# Altium PCB coaster.PcbDoc (part 2 of 2)
Units mm, origin at the board's own origin, x right, y up, seen from the top; angles counter-clockwise.
Board outline 33.53 x 29.59 mm, 2 copper layers (Top Layer, Bottom Layer); 49 components, 51 nets, 176 pads, 66 vias.
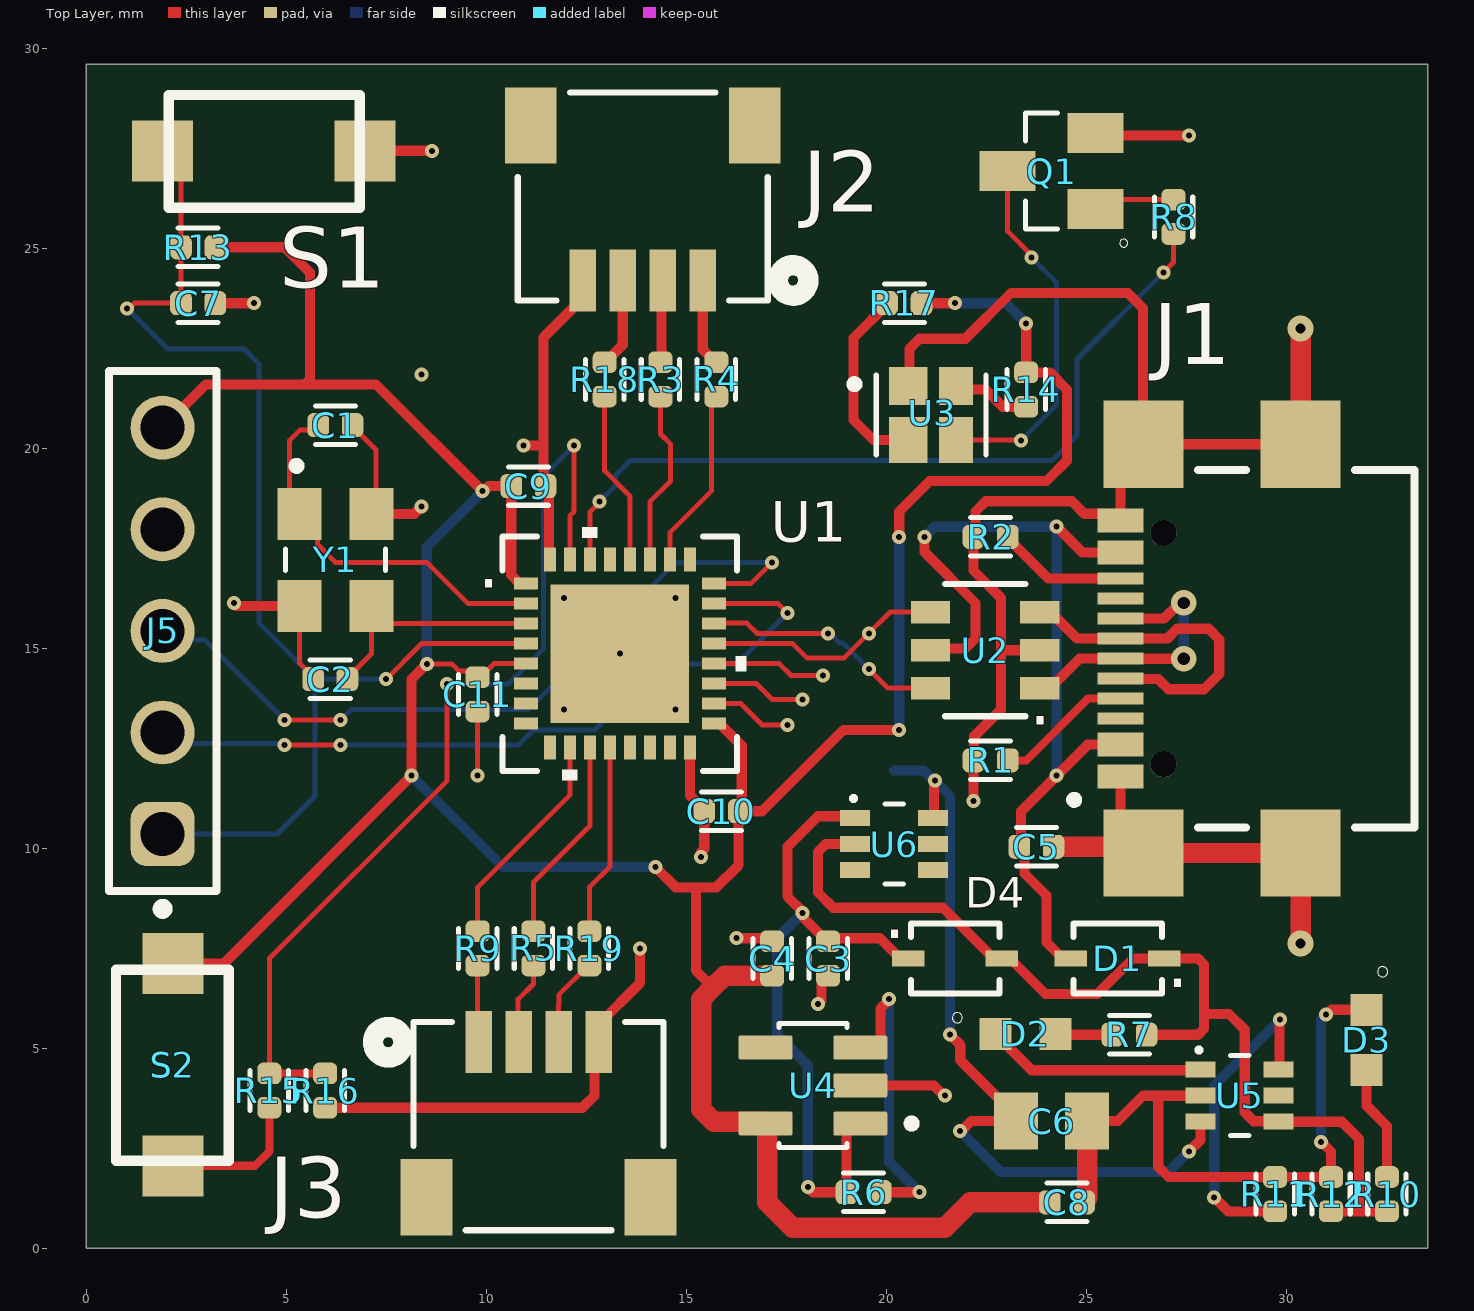
[diagram p0: Top Layer view]

## Via types
v1: diameter 0.35, hole 0.15, Top Layer to Bottom Layer, 62 vias
v2: diameter 0.65, hole 0.25, Top Layer to Bottom Layer, 2 vias
v3: diameter 0.635, hole 0.305, Top Layer to Bottom Layer, 2 vias

## Nets (pads, with @x,y where several pads share a name; then routed paths per layer and width w, separated by ;. In a path a pad name is that pad's centre, name@x,y a point inside that pad or via, vN(x,y) a via of type N, cw(c..) or ccw(c..) an arc to the next point about the centre after c; other vN are vias at no path point) (continued)
NetC3_1: (continued)
  Top Layer w0.254: v1(18.034,1.524) 18.161,1.397 R6.2 19.001,2.941 19.174,3.114 U4.1 ; U6.1 19.171,10.795 18.288,10.795 17.526,10.033 17.526,8.787 17.907,8.406 v1(17.907,8.382) 17.925,8.364 17.925,8.256 18.512,7.669 C3.1 18.62,7.747 19.837,7.747 20.345,7.239 D4.1
  Bottom Layer w0.254: v1(17.907,8.382) 17.272,7.747 17.272,5.334 18.034,4.572 v1(18.034,1.524)
NetD2_A: D2.A R7.2 | length 1.4
  Top Layer w0.254: D2.A 24.244,5.334 R7.2
NetD2_C: D2.C U5.1 | length 5.5
  Top Layer w0.254: D2.C 23.633,4.445 27.839,4.445 U5.1
NetD3_A: D3.A R10.2 | length 2.9
  Top Layer w0.254: D3.A 32.004,3.556 32.512,3.048 R10.2
NetJ1_A5: J1.A5 R1.1 | length 3.5
  Top Layer w0.203: R1.1 23.495,12.192 25.039,13.736 J1.A5
NetJ1_B5: J1.B5 R2.2 | length 3.3
  Top Layer w0.254: R2.2 23.036,17.75 24.05,16.736 J1.B5
NetJ2_1: J2.1 R4.2 | length 2.2
  Top Layer w0.254: J2.1 15.408,22.466 15.727,22.147 R4.2
NetJ2_2: J2.2 R3.2 | length 2.1
  Top Layer w0.254: R3.2 14.379,22.175 14.379,24.162 J2.2
NetJ2_3: J2.3 R18.2 | length 2.2
  Top Layer w0.254: R18.2 12.975,22.147 13.408,22.579 J2.3
NetJ3_1: J3.1 R9.2 | length 1.9
  Top Layer w0.125: R9.2 9.779,5.171 J3.1
NetJ3_2: J3.2 R5.2 | length 2.1
  Top Layer w0.125: J3.2 10.795,5.155 10.795,6.223 11.176,6.604 R5.2
NetJ3_3: J3.3 R19.2 | length 2.3
  Top Layer w0.125: J3.3 11.803,6.088 11.811,6.096 11.811,6.331 12.543,7.063 R19.2
NetQ1_1: Q1.1 R8.1 | length 2
  Top Layer w0.125: Q1.1 25.468,26.211 R8.1
NetQ1_3: Q1.3 U3.4 | length 9.2
  Top Layer w0.125: U3.4 23.358,20.203 v1(23.368,20.193) ; Q1.3 23.031,25.417 23.622,24.826 v1(23.622,24.765)
  Bottom Layer w0.125: v1(23.368,20.193) 24.257,21.082 24.257,24.13 v1(23.622,24.765)
NetR6_1: R6.1 U4.3 | length 7.8
  Top Layer w0.254: U4.3 19.676,5.014 19.849,5.187 19.849,5.98 20.066,6.197 v1(20.066,6.223) ; R6.1 v1(20.828,1.397)
  Bottom Layer w0.254: v1(20.066,6.223) 20.066,2.159 v1(20.828,1.397)
NetR8_2: R8.2 U1.30 | length 20.4
  Top Layer w0.125: U1.30 12.585,18.398 12.827,18.64 v1(12.827,18.669) ; v1(26.924,24.384) 26.924,24.389 27.178,24.643 R8.2
  Bottom Layer w0.125: v1(12.827,18.669) 13.23,19.072 13.23,19.326 13.589,19.685 24.13,19.685 24.765,20.32 24.765,22.225 v1(26.924,24.384)
NetR11_1: R11.1 U5.6 | length 8.1
  Top Layer w0.254: v1(28.194,1.27) 28.546,0.918 R11.1 ; U5.6 29.827,4.483 29.827,5.697 v1(29.845,5.715)
  Bottom Layer w0.254: v1(28.194,1.27) 28.194,4.064 v1(29.845,5.715)
NetR14_1: R14.1 U3.3 | length 2
  Top Layer w0.254: U3.3 21.835,21.463 22.479,21.463 22.909,21.033 R14.1
NetR15_1: R15.1 S2.1 | length 3.6
  Top Layer w0.203: S2.1 4.216,2.057 4.572,2.413 R15.1@4.572,3.429
NRST: C7.1 J5.1 R13.1 S1.2 U1.4 | length 30.5
  Top Layer w0.125: v1(1.016,23.495) 1.077,23.495 1.204,23.622 C7.1 R13.1 2.364,26.973 S1.2 ; v1(7.493,14.224) 8.378,15.109 U1.4
  Bottom Layer w0.125: v1(1.016,23.495) 2.032,22.479 3.937,22.479 4.318,22.098 4.318,15.621 5.715,14.224 ; J5.1 4.762,10.35 5.715,11.303 5.715,14.224 ; v1(7.493,14.224) 5.715,14.224
OSC_IN: C1.1 U1.2 Y1.1 | length 9.6
  Top Layer w0.125: C1.1 5.668,20.449 5.336,20.449 5.08,20.193 5.08,18.598 5.776,17.902 5.776,17.592 6.223,17.145 8.509,17.145 9.545,16.109 U1.2
OSC_OUT: C2.1 U1.3 Y1.3 | length 6.1
  Top Layer w0.125: C2.1 6.526,14.254 7.123,14.851 Y1.3 7.569,15.609 U1.3
PA1: U1.7
PA2: U1.8
PA3: U1.9
PA7: U1.13
PA8: U1.18 | length 2.1
  Top Layer w0.125: U1.18 16.363,13.609 16.891,13.081 v1(17.526,13.081)
PA9: U1.19 | length 2.4
  Top Layer w0.125: U1.19 16.752,14.109 17.145,13.716 v1(17.907,13.716)
PA10: U1.20 | length 2.9
  Top Layer w0.125: U1.20 17.322,14.609 17.616,14.314 v1(18.415,14.314)
PB0: U1.14
PB1: U1.15
PB6: U1.29
SENSE: R17.2 U3.2 | length 4.8
  Top Layer w0.254: R17.2 20.009,23.614 20.009,23.584 19.177,22.752 19.177,20.701 19.675,20.203 U3.2
SWCLK: J5.3 U1.24 | length 19.5
  Top Layer w0.125: v1(4.953,13.208) v1(6.35,13.208) ; U1.24 16.609,16.609 v1(17.145,17.145)
  Bottom Layer w0.125: J5.3 2.127,15.208 2.953,15.208 v1(4.953,13.208) ; v1(6.35,13.208) 6.604,13.462 11.049,13.462 14.732,17.145 v1(17.145,17.145)
SWDIO: J5.2 U1.23 | length 19.1
  Top Layer w0.125: v1(4.953,12.573) v1(6.35,12.573) ; U1.23 17.292,16.109 v1(17.526,15.875)
  Bottom Layer w0.125: J5.2 2.179,12.616 4.91,12.616 v1(4.953,12.573) ; v1(6.35,12.573) 10.795,12.573 11.176,12.954 12.7,12.954 14.351,14.605 16.256,14.605 v1(17.526,15.875)
USB_P: C5.1 D1.2 J1.A4/B9 J1.B4/A9 U2.5 | length 23.4
  Top Layer w0.254: v1(20.955,17.78) 20.955,17.399 22.225,16.129 22.225,15.24 21.973,14.988 21.145,14.988 U2.5 U2.5@21.081,14.968 ; v1(24.257,18.034) 24.905,17.386 J1.B4/A9 ; D1.2 24.409,7.239 24.003,7.645 24.003,8.814 23.452,9.365 23.452,9.9 C5.1 23.368,10.082 23.368,10.922 v1(24.257,11.811) 25.032,12.586 J1.A4/B9
  Top Layer w0.508: J1.A4/B9@25.849,12.573 J1.A4/B9
  Bottom Layer w0.254: v1(20.955,17.78) 21.209,18.034 v1(24.257,18.034) v1(24.257,11.811)
USBD+: J1.A6 J1.B6 U2.1 | length 6.8
  Top Layer w0.254: U2.1@23.905,13.97 U2.1@24.057,13.97 ; U2.1@24.219,14.151 24.242,14.151 24.827,14.736 J1.A6 25.851,14.734 27.43,14.734 v3(27.432,14.732) ; J1.B6 26.936,15.736 27.329,16.129 v3(27.432,16.129)
  Bottom Layer w0.254: v3(27.432,14.732) v3(27.432,16.129)
USBD-: J1.A7 J1.B7 U2.3 | length 8.5
  Top Layer w0.254: U2.3@23.844,15.809 23.905,15.748 24.257,15.748 24.769,15.236 J1.A7 27.02,15.236 27.265,15.481 28.054,15.481 28.321,15.215 28.321,14.351 27.94,13.97 27.051,13.97 26.797,14.224 25.861,14.224 J1.B7
VBAT: C6.2 J6.1 U5.3 U6.6 | length 19.4
  Top Layer w0.254: U6.6 21.191,10.77 21.191,11.666 v1(21.209,11.684) ; v1(21.59,5.334) 21.844,5.08 21.844,4.699 22.811,3.732 C6.2@22.811,3.706 ; v1(21.844,2.921) 21.87,2.921 22.124,3.175 C6.2 ; v1(27.559,2.413) 27.854,2.708 U5.3
  Bottom Layer w0.254: J6.1 20.929,11.938 21.183,11.684 v1(21.209,11.684) 21.59,11.303 v1(21.59,5.334) ; v1(21.844,2.921) 22.86,1.905 27.051,1.905 v1(27.559,2.413)
VUSB: D1.1 D4.2 R7.1 R10.1 R12.1 U5.4 U6.2 | length 25.8
  Top Layer w0.254: U6.2 18.48,10.098 18.288,9.906 18.288,8.89 18.669,8.509 21.412,8.509 22.682,7.239 D4.2 23.089,7.239 23.978,6.35 25.273,6.35 26.162,7.239 D1.1 27.791,7.239 27.94,7.09 27.94,5.853 ; R7.1 27.791,5.334 27.94,5.483 27.94,5.853 ; R12.1 31.813,0.918 ; R10.1 31.813,0.918 ; 27.94,5.853 28.564,5.853 28.956,5.461 28.956,3.398 29.185,3.169 29.794,3.169 U5.4 31.384,3.16 31.813,2.73 31.813,0.918
pads on no net: J1. J1.A8 J1.B8 J2.5 J2.6 J3.5 J3.6 U1.6 U1.25 U4.4 U5.5 U6.3 U6.4 U6.5

## Polygon pours and split planes (outlines as drawn)
GND on Bottom Layer "NONET_L-01_P-001" (solid, remove dead copper, pour order 0): 0.127,29.464 33.401,29.464 33.401,0.127 0.127,0.127

## Silkscreen, mask and mechanical layers (free items; w line width, h text height)
Bottom Overlay:
  text "B-" at 19.685,8.636 h1.52 r90
  text "B+" at 21.717,8.636 h1.52 r90
Mechanical 1:
  the board outline again, w0.051

## Text inside footprints (layer, text, board x,y; h text height)
U1: Mechanical 13 "*" at 11.176,16.129 h1.27
U2: Mechanical 13 "*" at 23.281,14.768 h1.27 r180